# Altium PCB PCB1.PcbDoc
Units mil, origin at the board's own origin, x right, y up, seen from the top; angles counter-clockwise.
Board outline 2696.85 x 2795.28 mil, 2 copper layers (Top Layer, Bottom Layer); 21 components, 21 nets, 81 pads, 33 vias.
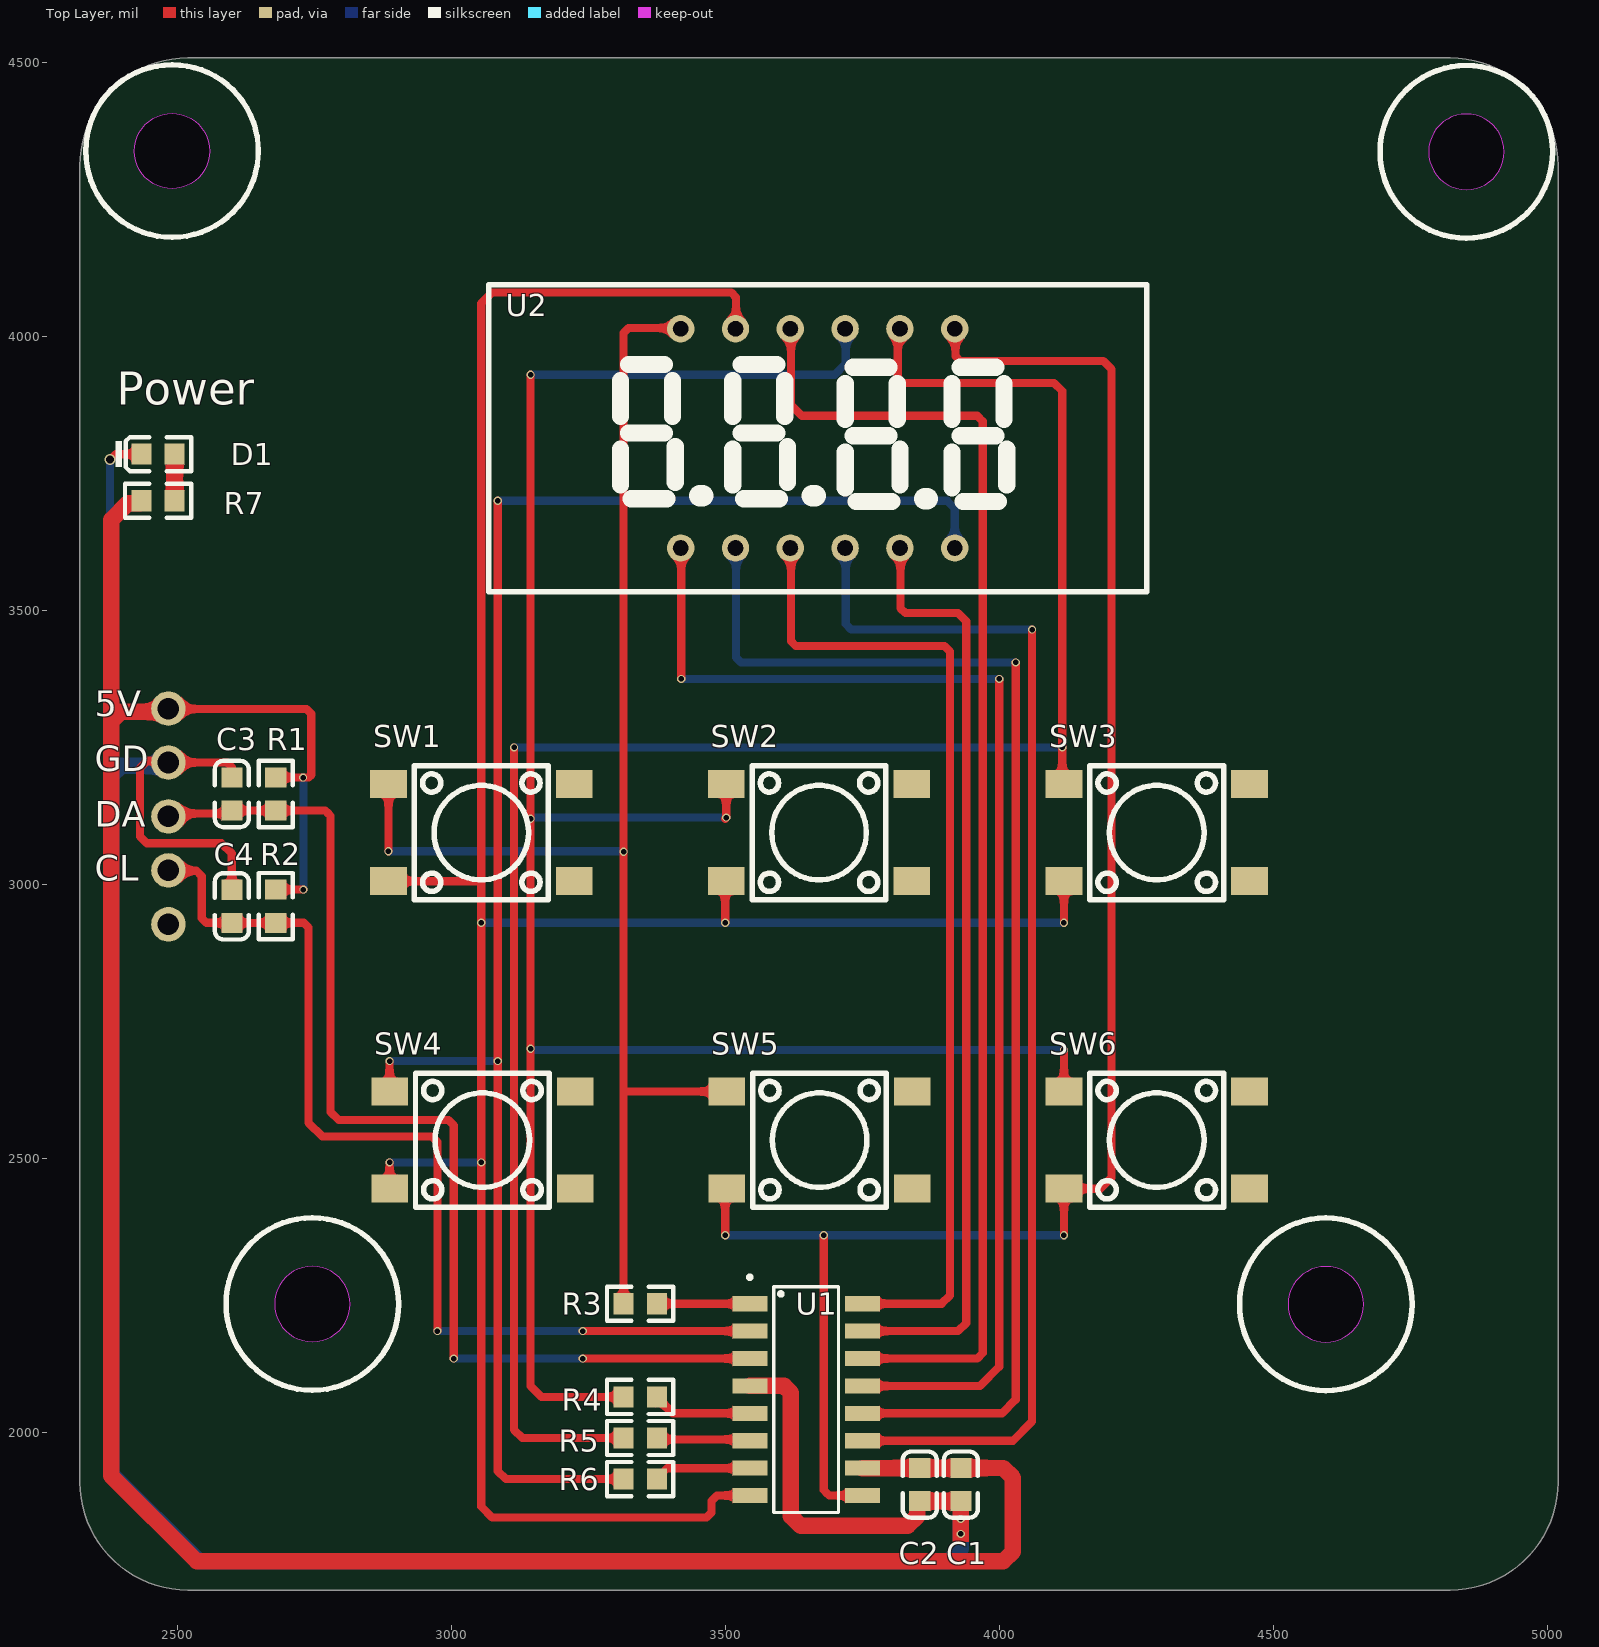
[diagram p0: Top Layer view]
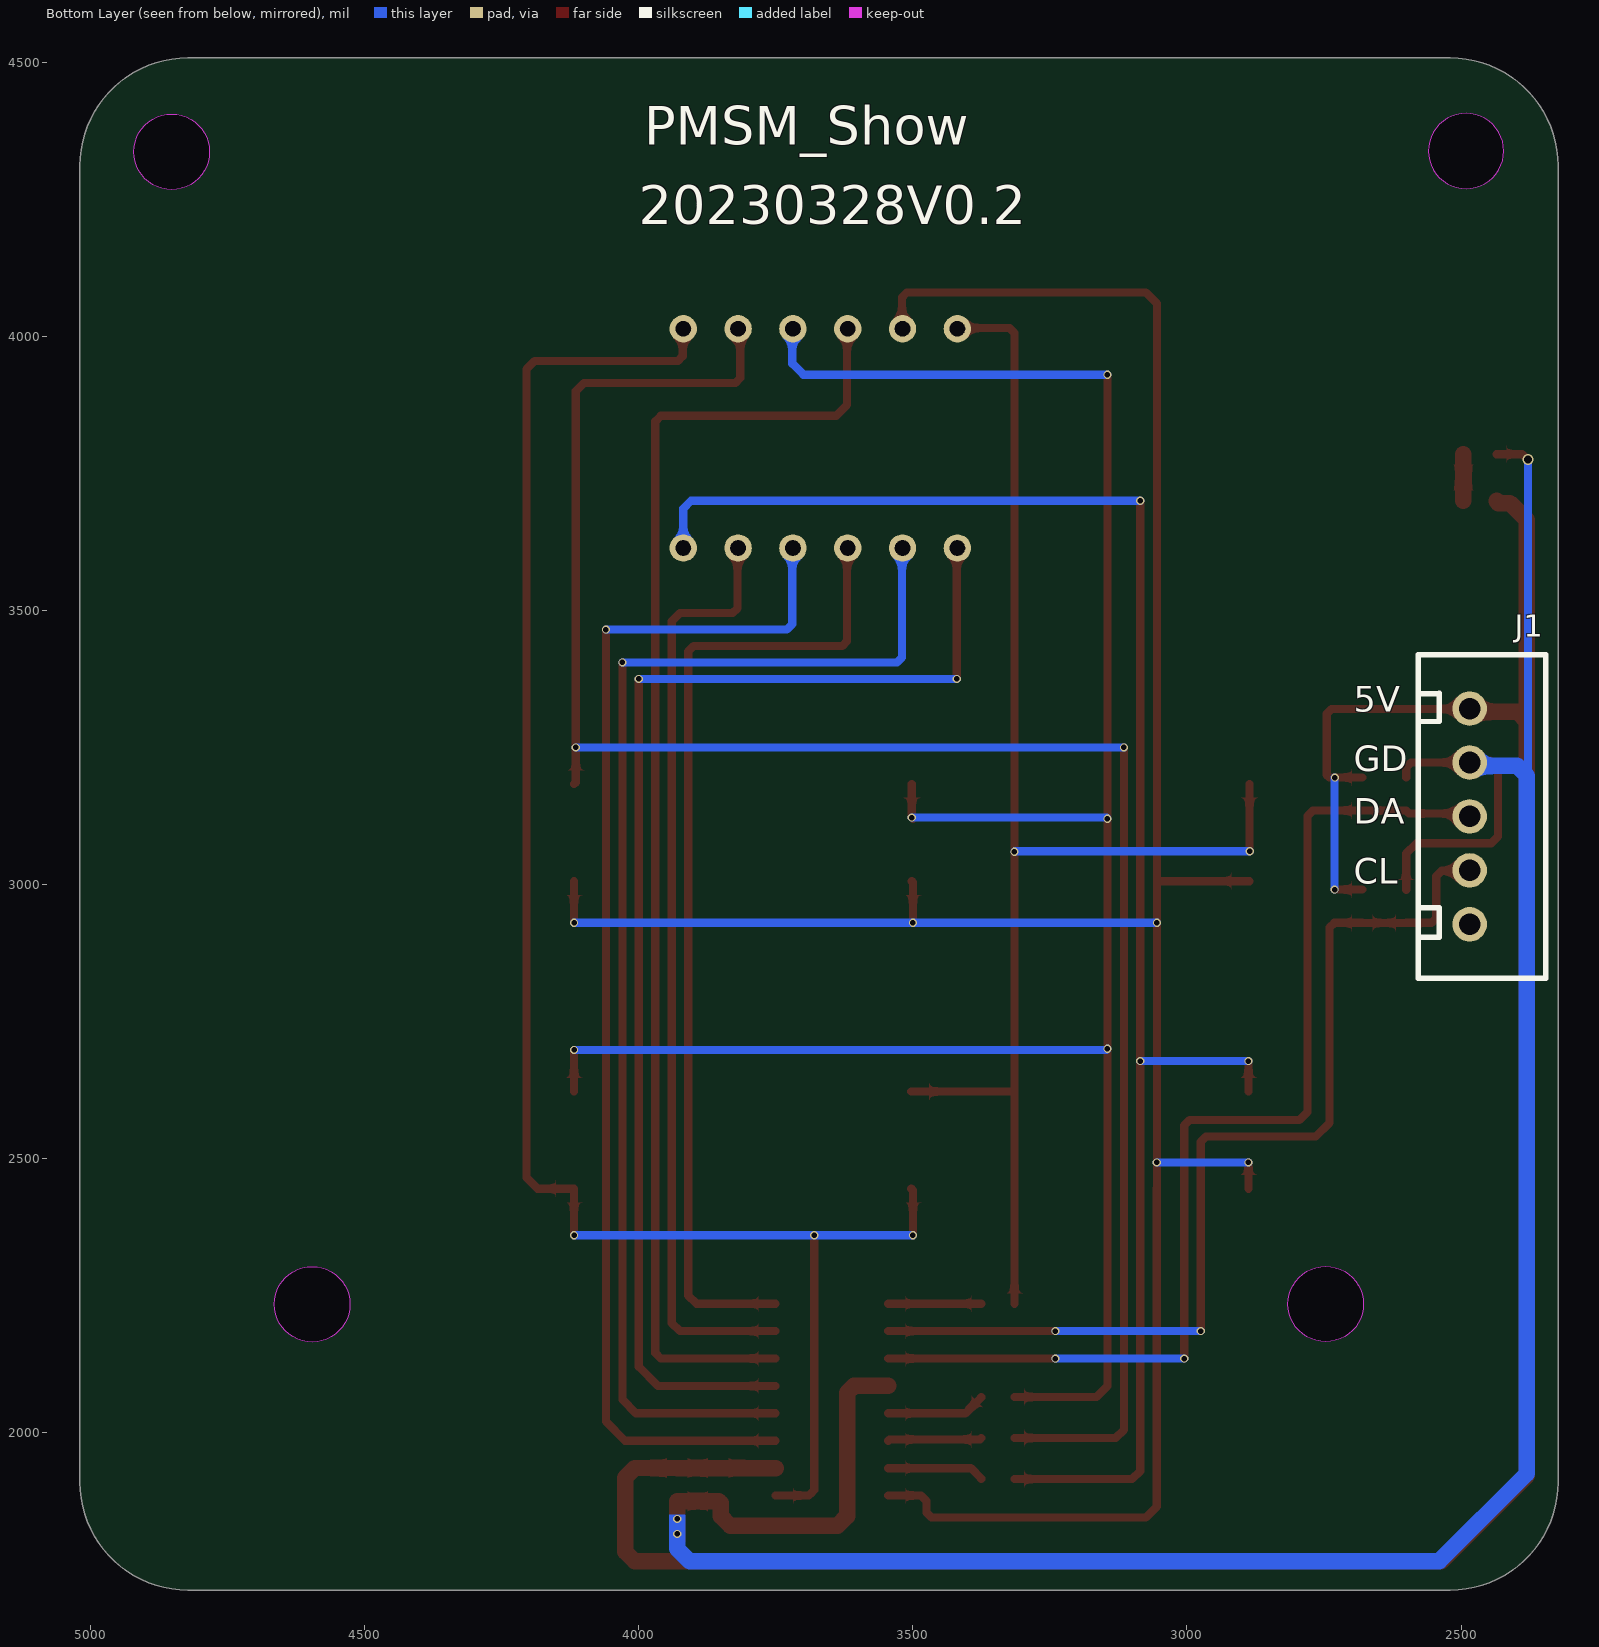
[diagram p1: Bottom Layer view, seen from below]
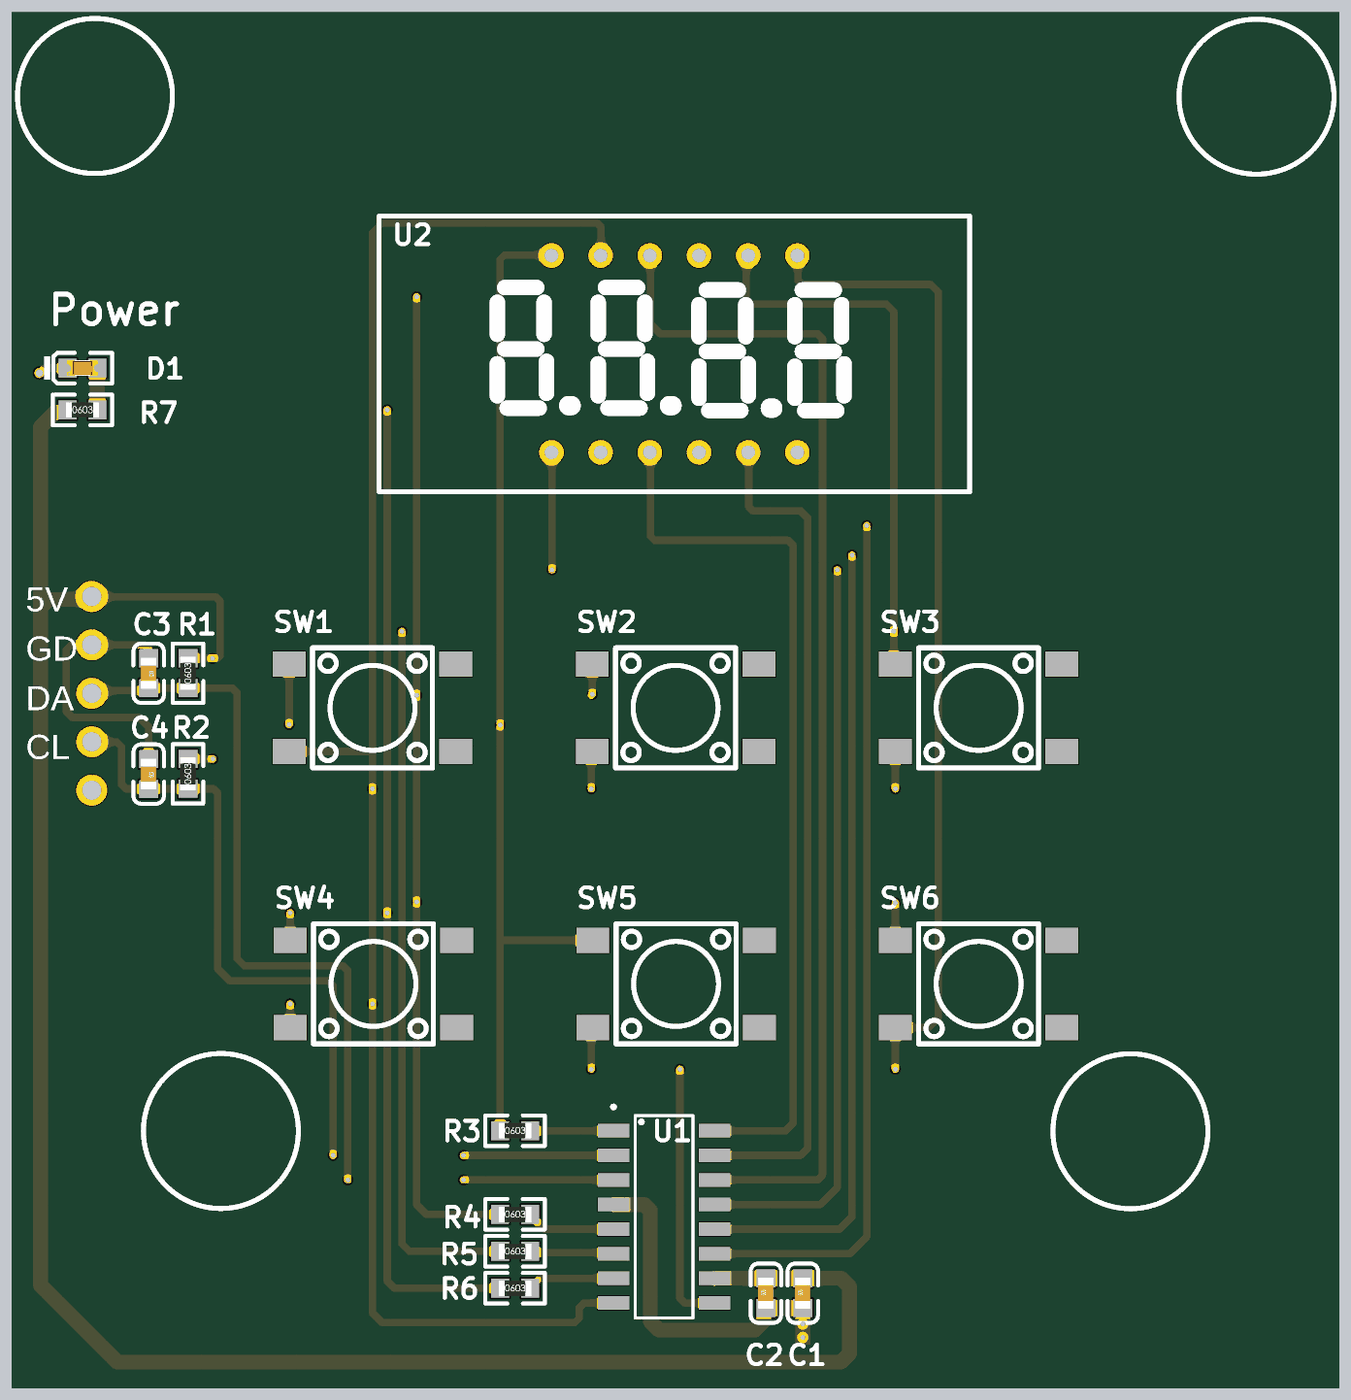
[diagram p2: 3D render of the assembled board from above, using the file's embedded part models]

## Layer stack, top to bottom
Top Solder: solder mask 0.4, Solder Resist, Dk 3.5
Top Layer: signal copper 1.4
Dielectric 1: dielectric 12.6, FR-4, Dk 4.8
Bottom Layer: signal copper 1.4
Bottom Solder: solder mask 0.4, Solder Resist, Dk 3.5

## Board outline
2322.83,1909.45 ccw(c2519.69,1909.45) 2519.68,1712.6 4822.83,1712.6 ccw(c4822.83,1909.45) 5019.69,1909.45 5019.69,4311.02 ccw(c4822.83,4311.02) 4822.83,4507.87 2519.68,4507.87 ccw(c2519.68,4311.02) 2322.83,4311.02
cut-out: 4527.1,2234 ccw(c4596,2234) 4596,2165.1 ccw(c4596,2234) 4664.9,2234 ccw(c4596,2234) 4596,2302.9 ccw(c4596,2234)
cut-out: 2677.92,2234.47 ccw(c2746.81,2234.47) 2746.81,2165.57 ccw(c2746.81,2234.47) 2815.71,2234.47 ccw(c2746.81,2234.47) 2746.81,2303.37 ccw(c2746.81,2234.47)
cut-out: 4783.46,4336.61 ccw(c4852.36,4336.61) 4852.36,4267.72 ccw(c4852.36,4336.61) 4921.26,4336.61 ccw(c4852.36,4336.61) 4852.36,4405.51 ccw(c4852.36,4336.61)
cut-out: 2490.82,4269.17 cw(c2490.82,4338.06) 2421.93,4338.06 cw(c2490.82,4338.06) 2490.82,4406.96 cw(c2490.82,4338.06) 2559.72,4338.06 cw(c2490.82,4338.06)

## Design rules (kind name [scope] priority, off if disabled: settings)
Clearance [All] p1: gap=10 ignorepadtopadclearanceinfootprint=FALSE except(0: Arc-Hole Track-Hole SMDPad-Hole THPad-Hole Via-Hole Fill-Hole Poly-Hole Region-Hole Text-Hole)
ComponentClearance [All] p1: gap=0 collisioncheckmode=3 verticalgap=0 showdistances=FALSE
HoleToHoleClearance [All] p1: gap=0 allowstackedmicrovias=TRUE
MinimumSolderMaskSliver [All] p1: minsoldermaskwidth=0
PolygonConnect [All] p1: connectstyle=Relief reliefconductorwidth=10 reliefentries=4 polygonreliefangle="90 Angle" airgapwidth=10
RoutingVias [All] p1: holewidth=10 width=15 viastyle="Through Hole" minholewidth=10 minwidth=13 maxholewidth=50 maxwidth=50
SilkToSilkClearance [All] p1: silktosilkclearance=0
SilkToSolderMaskClearance [IsPad] p1: minsilkscreentomaskgap=0 clearancetoexposedcopper=TRUE
SolderMaskExpansion [All] p1: expansion=4 istentingtop=FALSE
Width [All] p1: maxlimit=50 minlimit=10 preferedwidth=10
25 further rules are at their usual default settings.

## Components (designator, comment, footprint, x,y, rotation, side; value= is the part's Value field where it differs from the comment)
C1 "100nF (104) 10% 50V" 0603_C 3930,1905 r90 top
C2 "10uF (106) 10% 10V" 0603_C 3855,1905 r90 top
C3 "100pF (101) 5% 50V" 0603_C 2600,3165 r270 top
C4 "100pF (101) 5% 50V" 0603_C 2600,2960 r270 top
D1 "绿灯 0603" 0603_LED_S1 2465.31,3785 r0 top
J1 "CON5" XH2.54-5P 2484.25,2927.16 r90 bottom
R1 "10KΩ (1002) ±1%" 0603_R 2680,3165 r90 top
R2 "10KΩ (1002) ±1%" 0603_R 2680,2960.31 r90 top
R3 "2KΩ (2001) ±1%" 0603_R 3345,2235 r0 top
R4 "2KΩ (2001) ±1%" 0603_R 3345,2065 r0 top
R5 "2KΩ (2001) ±1%" 0603_R 3345,1990 r0 top
R6 "2KΩ (2001) ±1%" 0603_R 3345,1915 r0 top
R7 "10KΩ (1002) ±1%" 0603_R 2465.31,3700 r0 top
SW1 "立贴6*6*8" SW 3224.42,3005.91 r180 top locked
SW2 "立贴6*6*8" SW 3840.55,3005.91 r180 top locked
SW3 "立贴6*6*8" SW 4456.69,3005.91 r180 top locked
SW4 "立贴6*6*8" SW 3226.38,2444.88 r180 top locked
SW5 "立贴6*6*8" SW 3841.54,2444.88 r180 top locked
SW6 "立贴6*6*8" SW 4456.69,2444.88 r180 top locked
U1 "TM1650" TM1650 3545,2235 r0 top
U2 "3461AS" 3461AS 3418.9,3613.78 r0 top locked

## Footprints (in the part's own frame and the unit in brackets; to place one, negate y for a bottom-side part, rotate by r counter-clockwise, add the part's x,y. Pads: shape width x height; smd on the part's side, far side on the other; paste and mask are expansions set on the pad)
0603_C [mm]
  rect 0.93x0.98 smd: 1(-0.77,0) 2(0.77,0)
  silkscreen extent -1.53,-0.79 1.54,0.79, body extent -0.8,-0.4 0.8,0.4, height 0.3
0603_LED_S1 [mm]
  rect 0.93x0.98 smd: A(0.77,0) K(-0.77,0)
  silkscreen extent -1.97,-0.79 1.54,0.79, body extent -0.8,-0.4 0.8,0.4, height 0.6
0603_R [mm]
  rect 0.93x0.98 smd: 1(-0.77,0) 2(0.77,0)
  silkscreen extent -1.53,-0.79 1.54,0.79, body extent -0.85,-0.4 0.85,0.4, height 0.56
3461AS [mil]
  round 50 hole 28 slot 28.2 at 0 deg paste+0 mask+2: 1(0,0) 2(100,0) 3(200,0) 4(300,0) 5(400,0) 6(500,0) 7(500,400) 8(400,400) 9(300,400) 10(200,400) 11(100,400) 12(0,400)
  silkscreen extent -350,-80 850,480
SW [mm] "立贴6*6*8"
  rect 1.7x1.3 smd paste+0 mask+0.051: 1(0,0) 2(8.6,0) 3(0,-4.5) 4(8.6,-4.5)
  silkscreen extent 1.2,-5.35 7.4,0.85
TM1650 [mm]
  rect 1.62x0.7 smd paste+0 mask+0.051: 1(0,0) 2(0,-1.27) 3(0,-2.54) 4(0,-3.81) 5(0,-5.08) 6(0,-6.35) 7(0,-7.62) 8(0,-8.89) 9(5.22,-8.89) 10(5.22,-7.62) 11(5.22,-6.35) 12(5.22,-5.08) 13(5.22,-3.81) 14(5.22,-2.54) 15(5.22,-1.27) 16(5.22,0)
  silkscreen extent -0.09,-9.67 4.11,1.32
XH2.54-5P [mm]
  round 1.6 hole 1 paste+0 mask+0.05: 1(0,0) 2(2.5,0) 3(5,0) 4(7.5,0) 5(10,0)
  silkscreen extent -2.5,-3.53 12.5,2.38

## Part data
C1: library part "0603 100nF (104) 10% 50V", "贴片电容", Package=0603, SuppliersPartNumber=C14663, ComponentLink1Description=供应商链接, ComponentLink1URL=http://www.szlcsc.com/product/details_15331.html, Supplier=LC
C2: library part "0603 10uF (106) 10% 10V", "贴片电容", Package=0603, SuppliersPartNumber=C19702, ComponentLink1Description=供应商链接, ComponentLink1URL=http://www.szlcsc.com/product/details_20411.html, Supplier=LC
C3 C4: library part "0603 100pF (101) 5% 50V", "贴片电容", Package=0603, SuppliersPartNumber=C14858, ComponentLink1Description=供应商链接, ComponentLink1URL=http://www.szlcsc.com/product/details_15530.html, Supplier=LC
D1: library part "0603 绿灯", "发光二极管", Package=0603, SuppliersPartNumber=C72043, ComponentLink1Description=供应商链接, ComponentLink1URL=http://www.szlcsc.com/product/details_73152.html, Supplier=LC
R1 R2 R7: library part "0603 10KΩ (1002) 1%", "贴片电阻", Package=0603, SuppliersPartNumber=C25804, ComponentLink1Description=供应商链接, ComponentLink1URL=http://www.szlcsc.com/product/details_26547.html, Supplier=LC
R3 R4 R5 R6: library part "0603 2KΩ (2001) 1%", "贴片电阻", Package=0603, SuppliersPartNumber=C22975, ComponentLink1Description=供应商链接, ComponentLink1URL=http://www.szlcsc.com/product/details_23702.html, Supplier=LC
SW1 SW2 SW3 SW4 SW5 SW6: library part SW

## Via types
v1: diameter 15, hole 10, Top Layer to Bottom Layer, 32 vias
v2: diameter 20, hole 15, Top Layer to Bottom Layer, 1 vias

## Nets (pads, with @x,y where several pads share a name; then routed paths per layer and width w, separated by ;. In a path a pad name is that pad's centre, name@x,y a point inside that pad or via, vN(x,y) a via of type N, cw(c..) or ccw(c..) an arc to the next point about the centre after c; other vN are vias at no path point)
5VDD: C1.2 C2.2 J1.5 R1.2 R2.2 R7.1 U1.10 | length 4760
  Top Layer w15: J1.5 2485.12,3320 2736.21,3320 2745,3311.21 2745,3200 2740.32,3195.32 2730,3195.32 R1.2 ; R2.2 v1(2730.63,2990.63)
  Top Layer w30: R7.1 2435,3699.02 2431.69,3695.71 2410.71,3695.71 2380,3665 2380,3297.43 ; J1.5 2478.39,3315 2397.57,3315 2380,3297.43 ; U1.10 3750.67,1935.16 3855,1935.16 3929.84,1935.16 C1.2 4007.43,1935.32 4025,1917.74 4025,1782.57 4007.43,1765 2535.8,1765 2380,1920.8 2380,3297.43
  Bottom Layer w15: v1(2730.63,2990.63) v1@2730.63,3195
  other v1: 2730,3195
A: SW1.2 SW2.2 SW3.2 SW4.2 U1.8 U2.11 | length 4857.8
  Top Layer w15: SW1.2 3053.98,3005.91 3054.88,3005 ; SW4.2 v1(2887.79,2492.79) ; v1(3500,2930) 3500,3003.94 SW2.2 ; U2.11 3520,4014.88 3520,4071.21 3511.21,4080 3075,4080 3054.88,4059.88 3054.88,3005 ; U1.8 3485,1885 3475,1875 3475,1853.79 3466.21,1845 3460,1845 3075,1845 3055,1865 3055,2445 3054.88,2444.88 v1(3054.88,2929.88) 3054.88,3005 ; v1(4118.1,2930) SW3.2
  Bottom Layer w15: v1(2887.79,2492.79) v1(3055,2492.79) ; v1@3054.88,2930 v1(3500,2930) v1(4118.1,2930)
B: SW5.2 SW6.2 U1.9 U2.7 | length 3244.3
  Top Layer w15: v1(3500,2360) 3500,2441.94 SW5.2 ; v1(3680,2360) 3680,1895 3685.01,1889.99 3690,1885 U1.9 ; U2.7 3920,4012.68 3920,3963.79 3928.79,3955 4190,3955 4205,3940 4205,2465 4184.88,2444.88 SW6.2 v1(4118.1,2360)
  Bottom Layer w15: v1(3500,2360) v1(3680,2360) v1(4118.1,2360)
C: U1.11 U2.4 | length 2252.4
  Top Layer w15: U1.11 4025,1985 4060,2020 v1(4060,3465)
  Bottom Layer w15: U2.4 3720,3612.68 3720,3475 3730,3465 v1(4060,3465)
D: U1.12 U2.2 | length 2348.9
  Top Layer w15: U1.12 4005,2035 4030,2060 v1(4030,3405)
  Bottom Layer w15: U2.2 3520,3612.68 3520,3413.79 3528.79,3405 v1(4030,3405)
DIG1: R3.1 SW1.4 SW5.4 U2.12 | length 2621
  Top Layer w15: v1(2885.62,3060.62) 2885.83,3060.83 SW1.4 ; R3.1 3314.69,2625 ; U2.12 3417.68,4015 3323.47,4015 3314.69,4006.21 v1(3314.69,3059.69) 3314.69,2625 ; SW5.4 3317.64,2622.05 3314.69,2625
  Bottom Layer w15: v1(2885.62,3060.62) 3313.75,3060.62 v1(3314.69,3059.69)
DIG2: R4.1 SW2.4 SW6.4 U2.9 | length 4142.1
  Top Layer w15: v1(3145,3930) v1(3145,3120) v1(3145,2700) 3145,2085 3165,2065 R4.1 ; v1@3500,3120 v1(3501.96,3121.96) SW2.4 ; SW6.4 v1(4118.1,2698.1)
  Bottom Layer w15: v1(3145,2700) 3146.9,2698.1 v1(4118.1,2698.1) ; v1(3145,3120) 3146.96,3121.96 v1(3501.96,3121.96) ; v1(3145,3930) 3700,3930 3720,3950 3720,4012.68 U2.9
DIG3: R5.1 SW3.4 U2.8 | length 3570.6
  Top Layer w15: v1(3115,3250) 3115,2005 3130,1990 R5.1 ; U2.8 3815,4009.88 3815,3923.79 3823.79,3915 4100,3915 4115,3900 v1(4115,3250) 4115,3186.17 SW3.4
  Bottom Layer w15: v1(3115,3250) v1(4115,3250)
DIG4: R6.1 SW4.4 U2.6 | length 3170.8
  Top Layer w15: SW4.4 v1(2887.79,2677.79) ; v1(3085,3700) v1(3085,2677.79) 3085,1930 3100,1915 R6.1
  Bottom Layer w15: v1(2887.79,2677.79) v1(3085,2677.79) ; v1(3085,3700) 3905,3700 3918.9,3686.1 U2.6
DP: U1.16 U2.3 | length 1808.9
  Top Layer w15: U2.3 3620,3612.68 3620,3443.79 3628.79,3435 3900,3435 3910,3425 3910,2250 3895,2235 U1.16
E: U1.13 U2.1 | length 2338.2
  Top Layer w15: U2.1 3420,3612.68 v1(3420,3375) ; U1.13 3965,2085 4000,2120 v1(4000,3375)
  Bottom Layer w15: v1(3420,3375) v1(4000,3375)
F: U1.14 U2.10 | length 2425.3
  Top Layer w15: U2.10 3620,4012.68 3620,3875 3640,3855 3960,3855 3970,3845 3970,2145 3960,2135 U1.14
G: U1.15 U2.5 | length 1716
  Top Layer w15: U1.15 3925,2185 3940,2200 3940,3480 3925,3495 3828.79,3495 3820,3503.79 3820,3612.68 U2.5
GND: C1.1 C2.1 C3.1 C4.1 D1.K J1.4 U1.4 | length 4933.6
  Top Layer w15: v2(2377.84,3775) 2378.79,3775 2388.79,3785 D1.K ; C4.1 2600,3056.21 2581.21,3075 2445,3075 2432.5,3087.5 2432.5,3212.5 2445,3225 2481.69,3225 J1.4 2591.21,3222.44 2600,3213.65 C3.1
  Top Layer w30: U1.4 3607.43,2085 3620,2072.43 3620,1847.57 3637.57,1830 3833.14,1830 3850.71,1847.57 3850.71,1871.38 3854.02,1874.68 C2.1 C1.1 v1(3930,1842.34)
  Bottom Layer w15: v2(2377.84,3775) 2377.84,3200.71 2380,3198.55
  Bottom Layer w30: J1.4 2477.94,3216.13 2397.57,3216.13 2380,3198.55 2380,1925 2540,1765 3907.43,1765 3930,1787.57 v1(3930,1814.96)
NetD1_A: D1.A R7.2 | length 85
  Top Layer w30: R7.2 D1.A
NetR3_2: R3.2 U1.1 | length 169.7
  Top Layer w15: R3.2 U1.1
NetR4_2: R4.2 U1.5 | length 182.7
  Top Layer w15: R4.2 3375.32,2064.02 3404.33,2035 U1.5
NetR5_2: R5.2 U1.6 | length 171.8
  Top Layer w15: R5.2 3377.82,1987.5 3542.5,1987.5 U1.6
NetR6_2: R6.2 U1.7 | length 178.5
  Top Layer w15: R6.2 3375.32,1915.98 3394.33,1935 U1.7
SCL: C4.2 J1.2 R2.1 U1.2 | length 1864.6
  Top Layer w15: J1.2 2484.84,3025 2535,3025 2545,3015 2545,2938.79 2553.79,2930 2599.68,2930 C4.2 2600.16,2929.84 2679.84,2929.84 R2.1 2731.21,2930 2740,2921.21 2740,2565 2765,2540 2965,2540 2975,2530 v1(2975,2185) ; v1(3240,2185) U1.2
  Bottom Layer w15: v1(2975,2185) v1(3240,2185)
SDA: C3.2 J1.3 R1.1 U1.3 | length 2044.5
  Top Layer w15: J1.3 2489.59,3129.35 2594.66,3129.35 C3.2 R1.1 2770.31,3134.69 2774.99,3130.01 2780,3125 2780,3085 2780,2585 2795,2570 2995,2570 3005,2560 v1(3005,2135) ; v1(3240,2135) U1.3
  Bottom Layer w15: v1(3005,2135) v1(3240,2135)
pads on no net: J1.1 SW1.1 SW1.3 SW2.1 SW2.3 SW3.1 SW3.3 SW4.1 SW4.3 SW5.1 SW5.3 SW6.1 SW6.3

## Other copper
Top Layer:
  region net GND: 3945,1800 3945,1850 3915,1850 3915,1800
Bottom Layer:
  region net GND: 3945,1800 3945,1850 3915,1850 3915,1800

## Silkscreen, mask and mechanical layers (free items; w line width, h text height)
Top Overlay:
  circle w10: c4852.36,4336.61 r157.48
  circle w10: c2490.82,4338.06 r157.48
  circle w10: c4596,2234 r157.48
  circle w10: c2746.81,2234.47 r157.48
  text "Power" at 2390,3875 h60
  text "5V" at 2350,3290.89 h80
  text "GD" at 2350,3190.89 h80
  text "DA" at 2350,3090 h80
  text "CL" at 2350,2990.89 h80
Bottom Overlay:
  text "PMSM_Show" at 3990,4326.33 h120
  text "20230328V0.2" at 4000.11,4181.33 h120
  text "5V" at 2695.4,3299.67 h80
  text "GD" at 2695.4,3190.89 h80
  text "DA" at 2695.4,3095 h80
  text "CL" at 2695.4,2985.89 h80
Mechanical 1:
  circle w10: c4852.36,4336.61 r68.9
  circle w10: c2490.82,4338.06 r68.9
  circle w10: c4596,2234 r68.9
  circle w10: c2746.81,2234.47 r68.9
  lines w10: 2322.83,1909.45 ccw(c2519.69,1909.45) 2519.69,1712.6 ; 2322.83,4311.02 cw(c2519.68,4311.02) 2519.68,4507.87 ; 4822.83,1712.6 ccw(c4822.83,1909.45) 5019.68,1909.45 ; 4822.83,4507.87 cw(c4822.83,4311.02) 5019.68,4311.02
Mechanical 13:
  lines w10: 2322.83,1909.45 2322.83,4311.02 ; 2519.68,1712.6 4822.83,1712.6 ; 2519.68,4507.87 4822.83,4507.87 ; 5019.69,1909.45 5019.69,4311.02